# Altium PCB tr-804-DECT_2023-07.PcbDoc (part 3 of 3)
Units mm, origin at the board's own origin, x right, y up, seen from the top; angles counter-clockwise.
Board outline 65 x 137.8 mm, 4 copper layers (Top Layer, Top, Internal Plane 1, PWR, Internal Plane 2, GND, Bottom Layer, Bottom); 160 components, 162 nets, 856 pads, 321 vias.
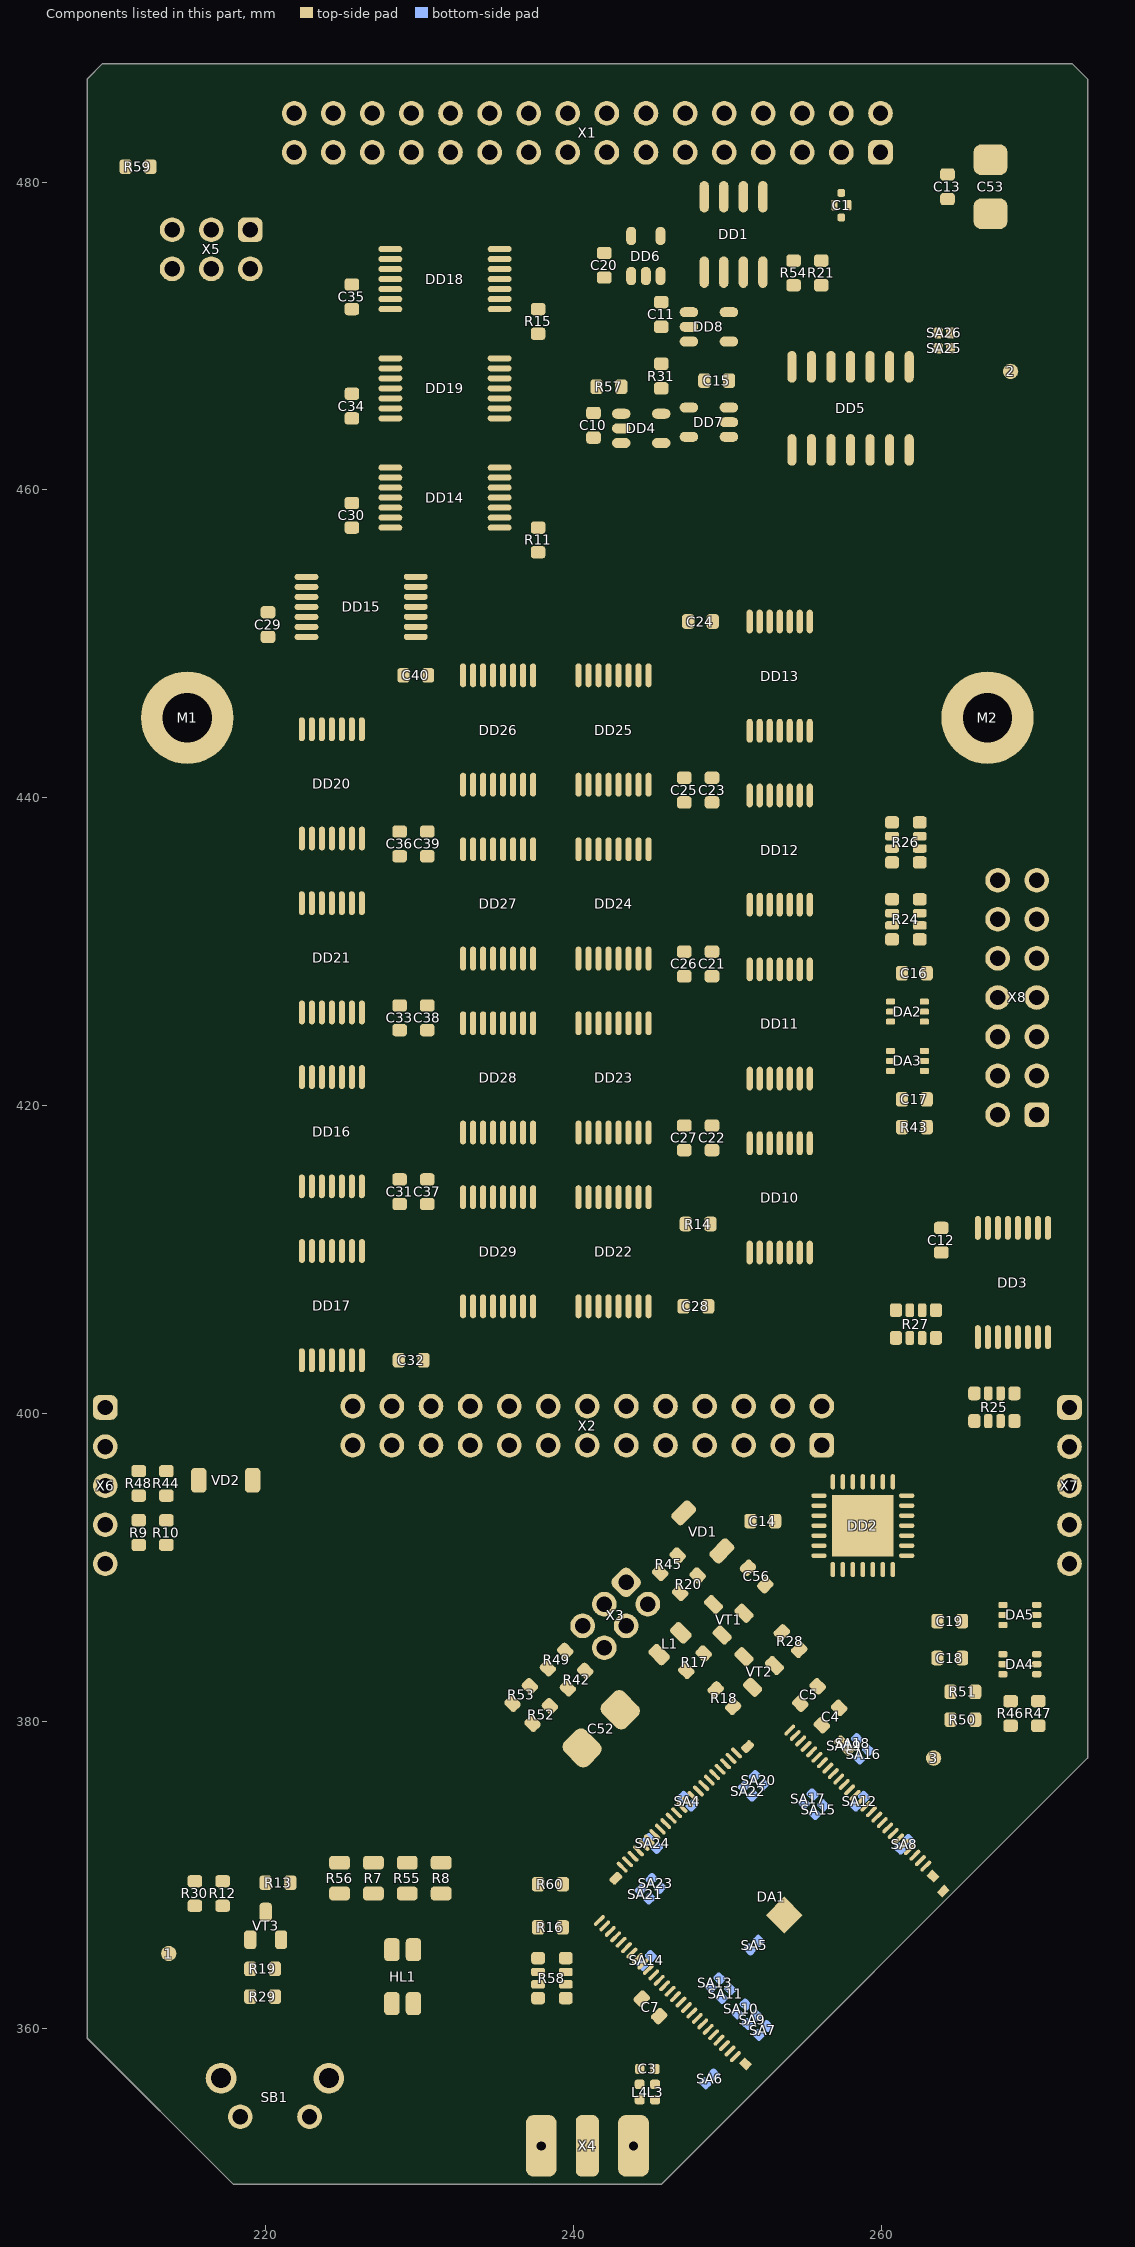
[diagram p5: the components of this part, seen from the top]

## Silkscreen, mask and mechanical layers (free items; w line width, h text height)
Top Solder, Top Mask:
  circle w0.2: c221.5,382.2 r8
  lines w0.2: 209,406.3 220,406.3 220,437.3 209,437.3 209,406.3
  text "+3.3V" at 259.4,473.9 h2.12
  text "LABEL BOARD" at 213.1,432.1 h3.17 r270
  text "TRACT" at 218.5,386.7 h3.17 r270
  text "LABEL" at 221.973,386.7 h3.17 r270
Mechanical 1, Top Assy:
  lines w0.001: 240.8,399.2 241,399.2 ; 240.8,483.2 241,483.2 ; 240.9,399.1 240.9,399.3 ; 240.9,483.1 240.9,483.3 ; 256.1,400.5 256.3,400.5 ; 256.2,400.4 256.2,400.6
  lines w0.01: 224.39,396.66 257.41,396.66 257.41,401.74 224.39,401.74 224.39,396.66
  lines w0.1: 183.7,347.3 272.5,347.3
  text "panel edge" at 183.7,347.5 h2.12

## Dimensions
208.4,486.7 to 273.4,486.7 on Keep-Out Layer, Board
209.4,487.7 to 217.9,349.9 on Keep-Out Layer, Board

## Text inside footprints (layer, text, board x,y; h text height)
DA1: Mechanical 1, Top Assy "balance" at 264.2,369.1 h1.41 r225